# EAGLE board acceso (EAGLE 7.2.0)
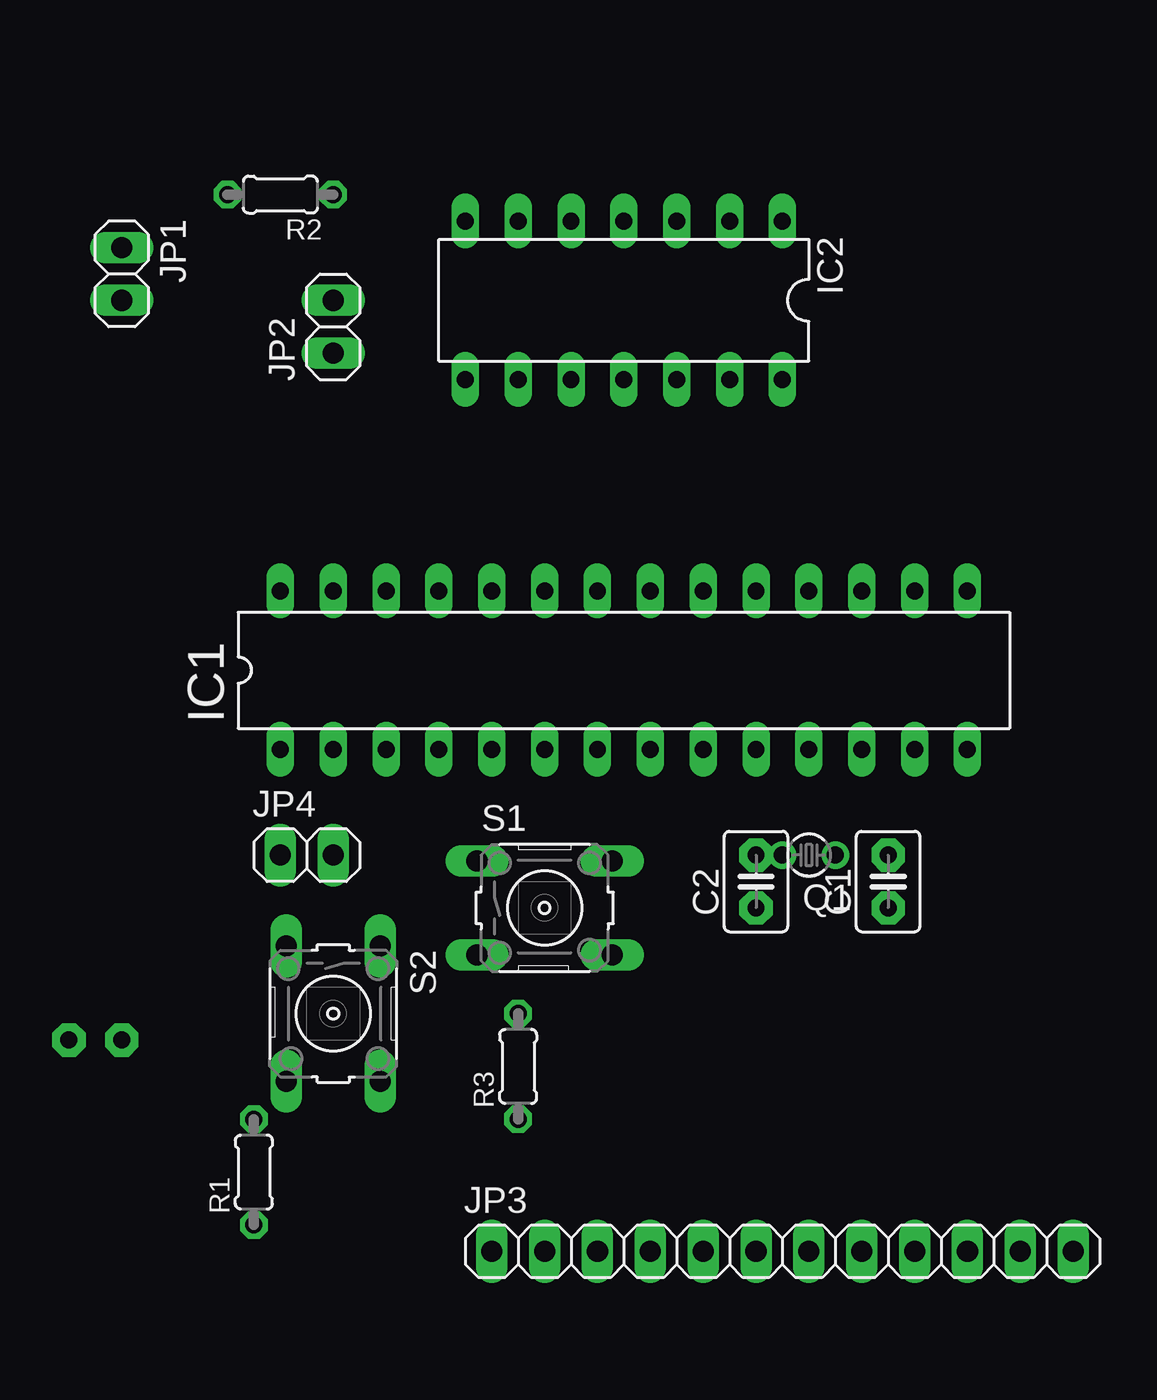
[diagram p0: board, top side]
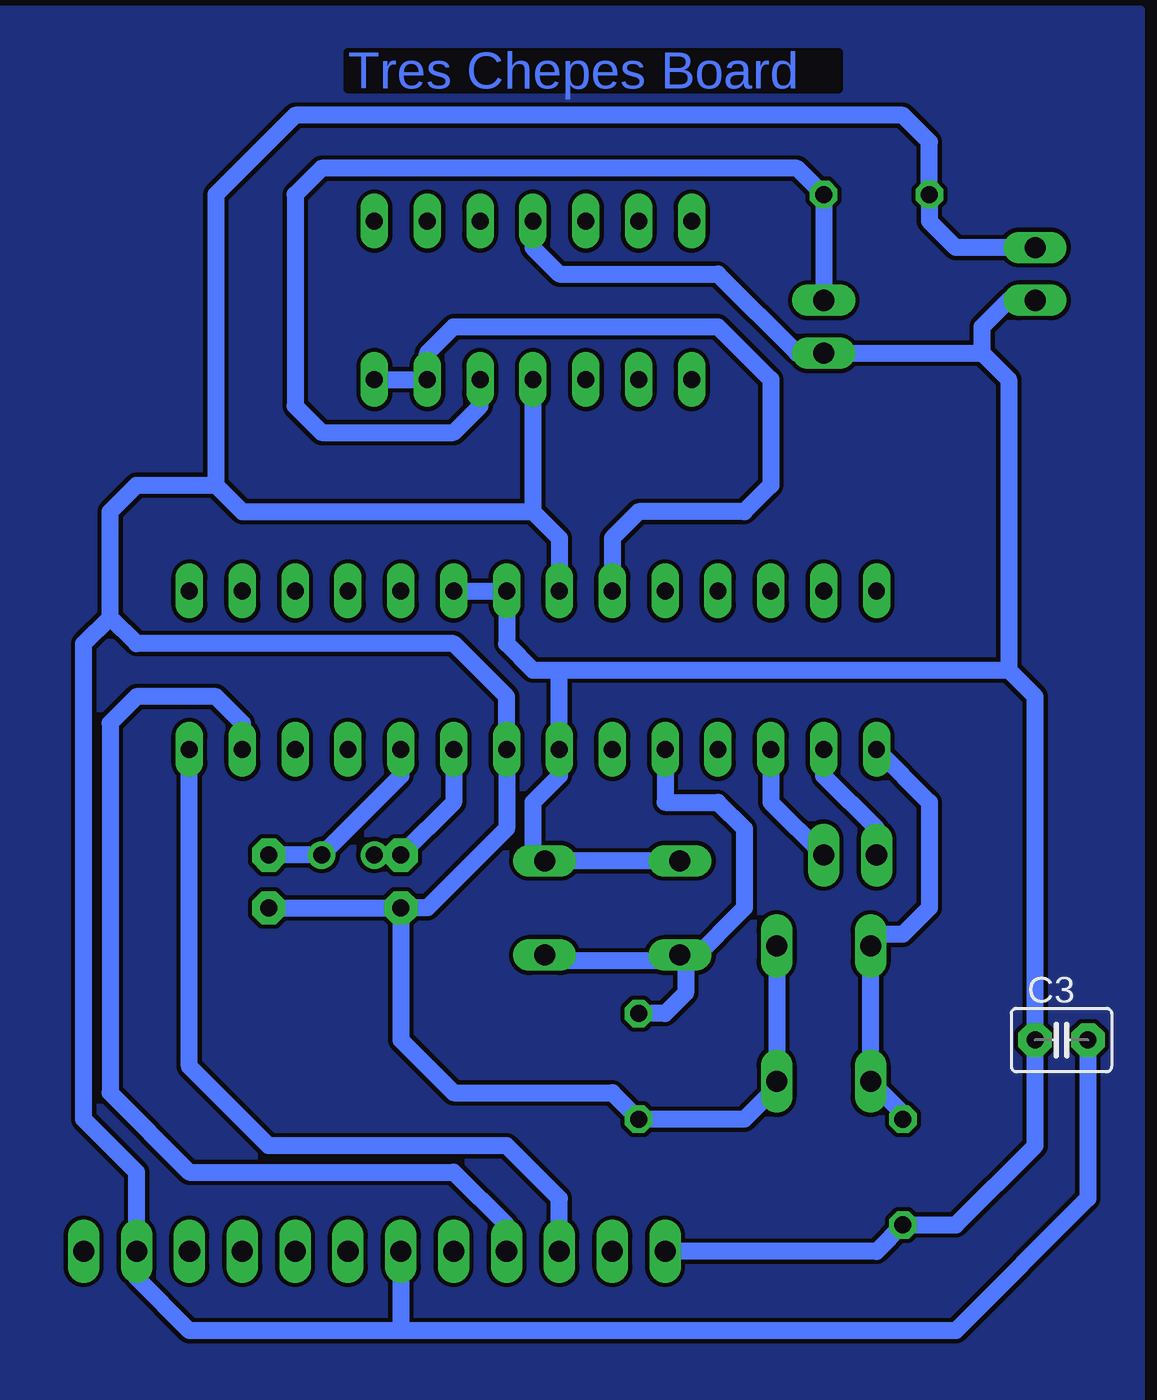
[diagram p1: board, bottom side, seen from below]

No outline drawn. Coordinates in mm, seen from the top.
Copper layers (1*16): Top 0.035mm / dielectric 1.5mm / Bottom 0.035mm
Design rules "default": minimum track width 10mil, minimum drill 24mil, track to track 8mil, track to pad 8mil, pad to pad 8mil, via to via 8mil, smd to smd 8mil, copper to edge 40mil, drill to drill 8mil, minimum pad ring 10mil, minimum via ring 8mil, stop-mask expansion 4mil, vias tented up to drill 0mil, thermal gap 10mil

## Footprints (pad centres in the part's own frame; a part is rotated, then mirrored left to right if it is on the bottom)
C2.5-3 = drill 0.813 pad 1.6 octagon: 1 -1.27,0; 2 1.27,0
DIL28-3 = drill 0.813 long: 1 -16.51,-3.81; 2 -13.97,-3.81; 3 -11.43,-3.81; 4 -8.89,-3.81; 5 -6.35,-3.81; 6 -3.81,-3.81; 7 -1.27,-3.81; 8 1.27,-3.81; 9 3.81,-3.81; 10 6.35,-3.81; 11 8.89,-3.81; 12 11.43,-3.81; 13 13.97,-3.81; 14 16.51,-3.81; 15 16.51,3.81; 16 13.97,3.81; 17 11.43,3.81; 18 8.89,3.81; 19 6.35,3.81; 20 3.81,3.81; 21 1.27,3.81; 22 -1.27,3.81; 23 -3.81,3.81; 24 -6.35,3.81; 25 -8.89,3.81; 26 -11.43,3.81; 27 -13.97,3.81; 28 -16.51,3.81
DIL14 = drill 0.813 long: 1 -7.62,-3.81; 2 -5.08,-3.81; 3 -2.54,-3.81; 4 0,-3.81; 5 2.54,-3.81; 6 5.08,-3.81; 7 7.62,-3.81; 8 7.62,3.81; 9 5.08,3.81; 10 2.54,3.81; 11 0,3.81; 12 -2.54,3.81; 13 -5.08,3.81; 14 -7.62,3.81
1X02 = drill 1.016 long: 1 -1.27,0; 2 1.27,0
1X12 = drill 1.016 long: 1 -13.97,0; 2 -11.43,0; 3 -8.89,0; 4 -6.35,0; 5 -3.81,0; 6 -1.27,0; 7 1.27,0; 8 3.81,0; 9 6.35,0; 10 8.89,0; 11 11.43,0; 12 13.97,0
TC26V = drill 0.813: 1 -1.27,0; 2 1.27,0
0204/5 = drill 0.813 octagon: 1 -2.54,0; 2 2.54,0
B3F-10XX = drill 1.016 long: 1 -3.251,2.261; 2 3.251,2.261; 3 -3.251,-2.261; 4 3.251,-2.261

## Placement (x,y rotation side)
C1  [C2.5-3]  44.45,26.67 90 top
C2  [C2.5-3]  38.1,26.67 90 top
C3  [C2.5-3]  6.35,19.05 0 bottom
IC1  MEGA8-P  [DIL28-3]  31.75,36.83 0 top
IC2  LM324N  [DIL14]  31.75,54.61 180 top
JP1  [1X02]  7.62,55.88 270 top
JP2  [1X02]  17.78,53.34 90 top
JP3  [1X12]  39.37,8.89 0 top
JP4  [1X02]  16.51,27.94 0 top
Q1  [TC26V]  40.64,27.94 180 top
R1  [0204/5]  13.97,12.7 90 top
R2  [0204/5]  15.24,59.69 180 top
R3  [0204/5]  26.67,17.78 90 top
S1  [B3F-10XX]  27.94,25.4 0 top
S2  [B3F-10XX]  17.78,20.32 270 top

## Library data of the parts
C1-C3 = capacitor-wima
IC1 = atmel; OC_FARNELL: unknown; OC_NEWARK: unknown
IC2 = linear
JP1-JP4 = pinhead
Q1 = crystal; OC_FARNELL: unknown; OC_NEWARK: unknown
R1-R3 = rcl
S1 S2 = switch-omron; MPN: B3F-1000; OC_FARNELL: 176432; OC_NEWARK: 36M3542

## Nets
5V: C3.1 IC1.7 IC1.20 IC1.21 IC2.4 JP1.2 JP2.1 JP3.1 R1.1 S1.1 S1.2
GND: C1.1 C2.1 C3.2 IC1.8 IC1.22 IC2.11 JP1.1 JP3.6 JP3.11 R2.2 R3.1 S2.1 S2.2
N$1: IC1.23 IC2.13 IC2.14
N$2: IC1.14 JP3.3
N$3: IC1.13 JP3.4
N$4: IC1.5 R3.2 S1.3 S1.4
N$5: IC1.3 JP4.2
N$6: IC2.12 JP2.2 R2.1
N$7: IC1.2 JP4.1
N$14: C2.2 IC1.9 Q1.2
N$15: C1.2 IC1.10 Q1.1
N$16: IC1.1 R1.2 S2.3 S2.4

## Tracks (layer width: path | path; a pad name or v marks a point on that pad's centre or on a via)
5V
  Bottom 0.813: IC2.4 31.75,57.15 30.48,55.88 22.86,55.88 19.05,52.07 JP2.1 10.16,52.07 | IC1.20 IC1.21 33.02,38.1 31.75,36.83 30.48,36.83 | 30.48,36.83 8.89,36.83 | 10.16,52.07 10.16,53.34 8.89,54.61 JP1.2 | 10.16,52.07 8.89,50.8 8.89,36.83 | 8.89,36.83 7.62,35.56 C3.1 7.62,13.97 11.43,10.16 R1.1 15.24,8.89 JP3.1 | S1.1 S1.2 31.75,28.22 31.75,30.48 30.48,31.75 IC1.7 30.48,36.83
GND
  Bottom 0.813: IC2.11 31.75,44.45 | 31.75,44.45 30.48,43.18 IC1.22 | 46.99,45.72 46.99,59.69 43.18,63.5 13.97,63.5 12.7,62.23 R2.2 12.7,58.42 11.43,57.15 JP1.1 | 46.99,45.72 45.72,44.45 31.75,44.45 | 52.07,39.37 50.8,38.1 35.56,38.1 33.02,35.56 IC1.8 33.02,29.21 36.83,25.4 C2.1 | 52.07,39.37 52.07,44.45 50.8,45.72 46.99,45.72 | S2.1 S2.2 20.04,16.79 21.59,15.24 R3.1 27.94,16.51 35.56,16.51 38.1,19.05 C2.1 | C3.2 5.08,11.43 11.43,5.08 38.1,5.08 | 38.1,5.08 48.26,5.08 50.8,7.62 JP3.11 50.8,12.7 53.34,15.24 53.34,38.1 52.07,39.37 | C1.1 C2.1 | JP3.6 38.1,5.08
N$1
  Bottom 0.813: IC2.14 IC2.13 36.83,52.07 35.56,53.34 22.86,53.34 20.32,50.8 20.32,45.72 21.59,44.45 26.67,44.45 27.94,43.18 IC1.23
N$2
  Bottom 0.813: JP3.3 30.48,11.43 33.02,13.97 44.45,13.97 48.26,17.78 IC1.14
N$3
  Bottom 0.813: IC1.13 45.72,34.29 46.99,35.56 50.8,35.56 52.07,34.29 52.07,16.51 48.26,12.7 35.56,12.7 33.02,10.16 JP3.4
N$4
  Bottom 0.813: IC1.5 25.4,30.48 22.86,30.48 21.59,29.21 21.59,25.4 24.13,22.86 24.41,22.86 | 24.41,22.86 S1.3 | 24.41,22.86 30.91,22.86 S1.4 | 24.41,22.86 24.41,21.31 25.4,20.32 R3.2
N$5
  Bottom 0.813: IC1.3 20.32,30.48 JP4.2
N$6
  Bottom 0.813: JP2.2 R2.1 19.05,60.96 41.91,60.96 43.18,59.69 43.18,49.53 41.91,48.26 35.56,48.26 34.29,49.53 IC2.12
N$7
  Bottom 0.813: IC1.2 17.78,31.75 15.24,29.21 JP4.1
N$8
  pour Bottom: 2.54,1.27 59.69,1.27 59.69,3.81 59.69,68.58 2.54,68.58
N$14
  Bottom 0.813: IC1.9 35.56,30.48 C2.2 Q1.2
N$15
  Bottom 0.813: IC1.10 38.1,31.75 Q1.1 C1.2
N$16
  Bottom 0.813: IC1.1 12.7,30.48 12.7,25.4 13.97,24.13 14.96,24.13 S2.3 S2.4 13.97,15.52 R1.2

## Text on the board
Bottom: Tres Chepes Board